# Altium PCB SM3320-BATT-EV.PcbDoc (part 1 of 2)
Units mm, origin at the board's own origin, x right, y up, seen from the top; angles counter-clockwise.
Board outline 119 x 66.5 mm, 2 copper layers (Top Layer, Bottom Layer), stack 1.662 mm thick; 115 components, 48 nets, 280 pads, 270 vias.
Unrouted connection lines stored in the file: 11.
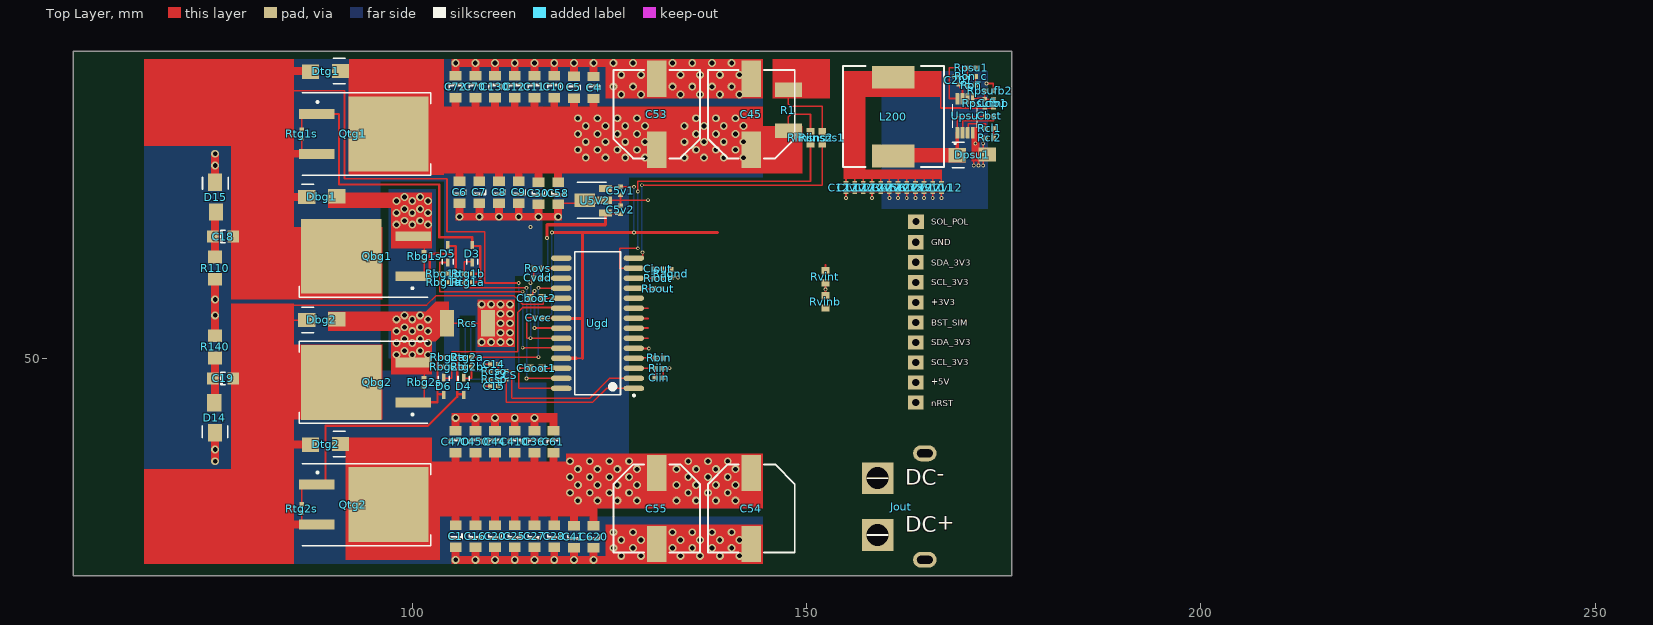
[diagram p0: Top Layer view]
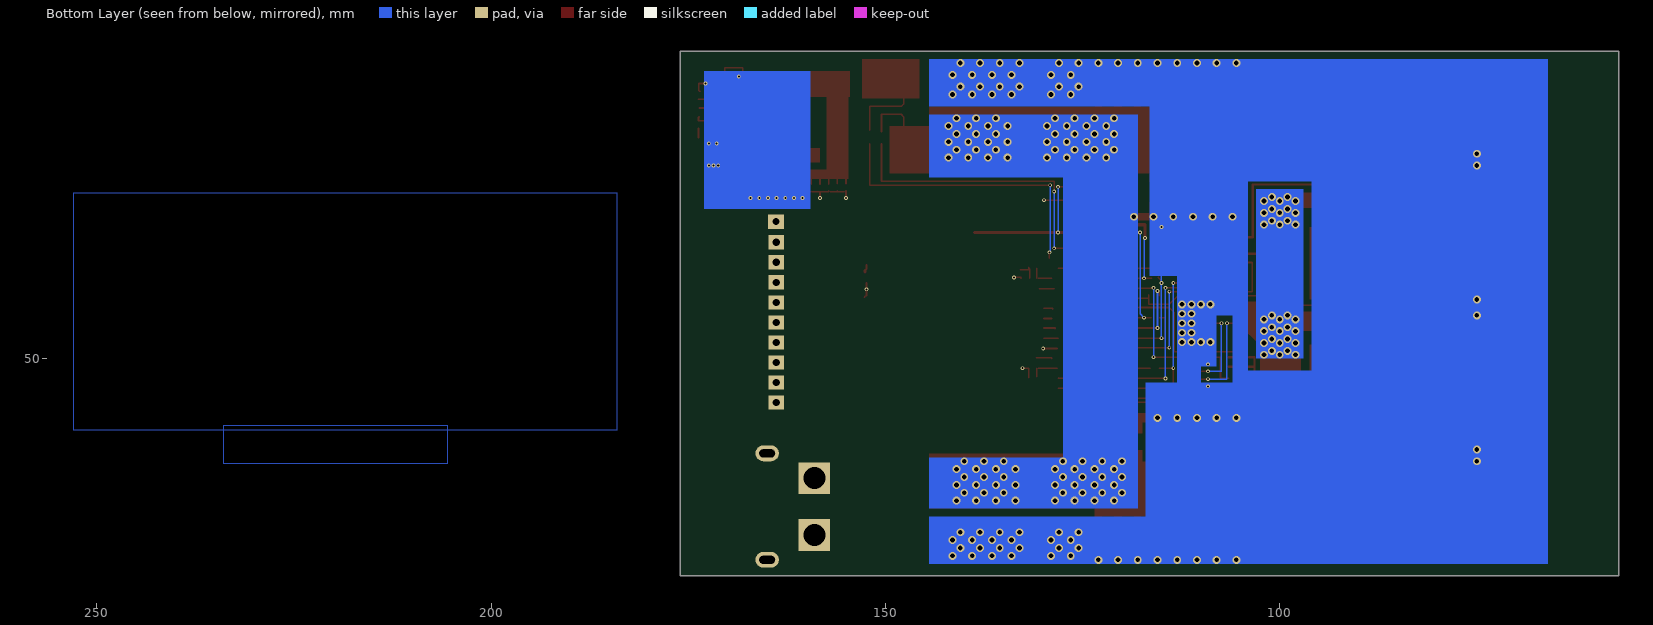
[diagram p1: Bottom Layer view, seen from below]
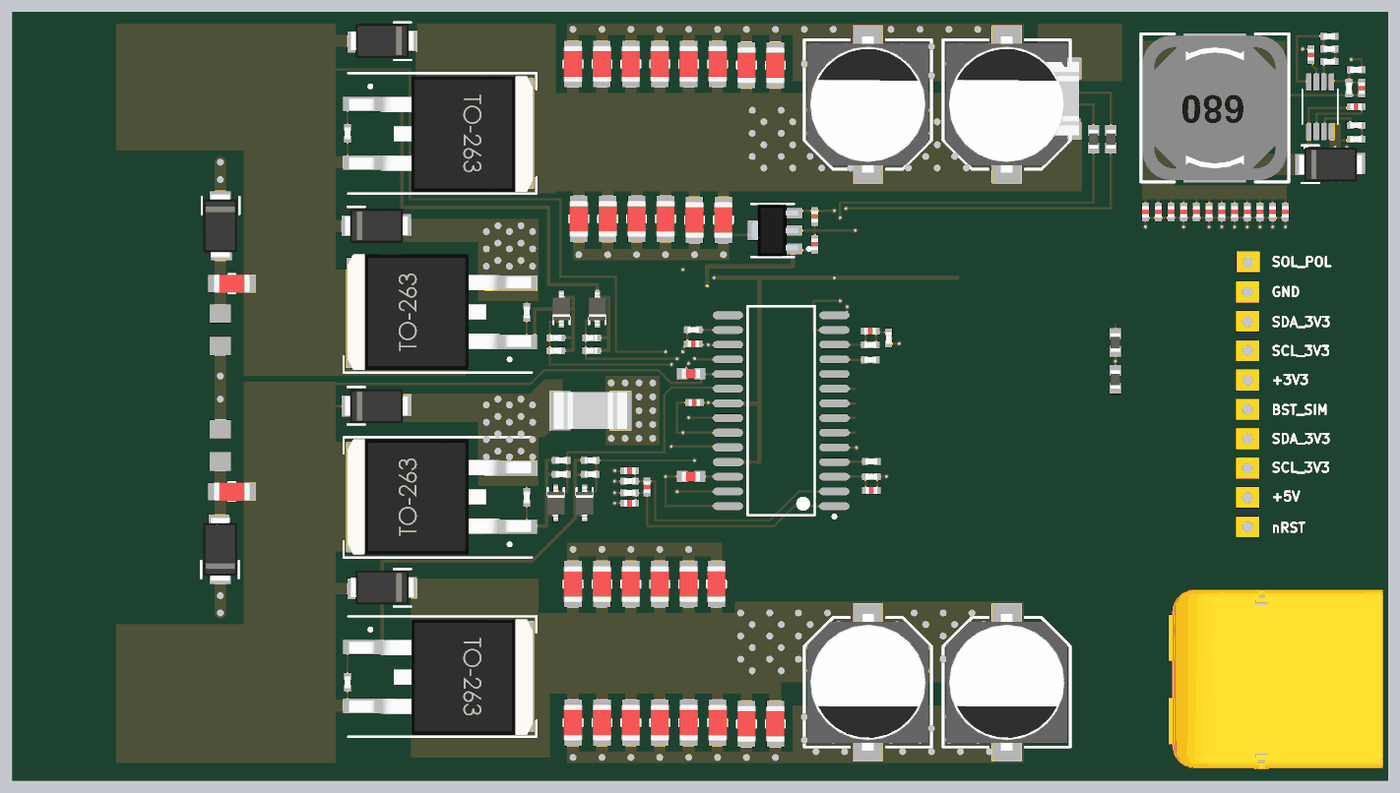
[diagram p3: 3D render of the assembled board from above, using the file's embedded part models]

## Layer stack, top to bottom
Top Solder: solder mask 0.0102, Solder Resist, Dk 3.5
Top Layer: signal copper 0.0711
Dielectric1: core 1.52, FR-4, Dk 4.8
Bottom Layer: signal copper 0.0711
Bottom Solder: solder mask 0.0102, Solder Resist, Dk 3.5

## Board outline
57,22.5 57,89 176,89 176,22.5

## Design rules (kind name [scope] priority, off if disabled: settings)
Clearance Clearance_12 [(IsRegion AND InNet('VIN_D') AND OnLayer('MidLayer4'))] p1: gap=0.61 ignorepadtopadclearanceinfootprint=FALSE except(0: Arc-Hole Track-Hole SMDPad-Hole THPad-Hole Via-Hole Fill-Hole Poly-Hole Region-Hole Text-Hole)
Clearance Clearance_11 [(IsRegion AND InNet('GND') AND OnLayer('MidLayer3'))] p2 off: gap=0.61 ignorepadtopadclearanceinfootprint=FALSE except(0: Arc-Hole Track-Hole SMDPad-Hole THPad-Hole Via-Hole Fill-Hole Poly-Hole Region-Hole Text-Hole)
Clearance Clearance_10 [InNamedPolygon('Top Layer-No Net 15')] p3: gap=0.635 ignorepadtopadclearanceinfootprint=FALSE except(0: Arc-Hole Track-Hole SMDPad-Hole THPad-Hole Via-Hole Fill-Hole Poly-Hole Region-Hole Text-Hole)
Clearance Clearance_8 [InNamedPolygon('Bottom Layer-No Net 5')] p4: gap=0.635 ignorepadtopadclearanceinfootprint=FALSE except(0: Arc-Hole Track-Hole SMDPad-Hole THPad-Hole Via-Hole Fill-Hole Poly-Hole Region-Hole Text-Hole)
Clearance Clearance_6 [InNamedPolygon('MidLayer1-No Net 5')] p5: gap=0.406 ignorepadtopadclearanceinfootprint=FALSE except(0: Arc-Hole Track-Hole SMDPad-Hole THPad-Hole Via-Hole Fill-Hole Poly-Hole Region-Hole Text-Hole)
Clearance Clearance_13 [InNamedPolygon('MidLayer3-No Net 5')] p6: gap=0.406 ignorepadtopadclearanceinfootprint=FALSE except(0: Arc-Hole Track-Hole SMDPad-Hole THPad-Hole Via-Hole Fill-Hole Poly-Hole Region-Hole Text-Hole)
Clearance Clearance_5 [InNamedPolygon('Top Layer-No Net 16')] p7: gap=0.635 ignorepadtopadclearanceinfootprint=FALSE except(0: Arc-Hole Track-Hole SMDPad-Hole THPad-Hole Via-Hole Fill-Hole Poly-Hole Region-Hole Text-Hole)
Clearance Clearance_3 [InNamedPolygon('Top Layer-No Net 17')] p8: gap=0.635 ignorepadtopadclearanceinfootprint=FALSE except(0: Arc-Hole Track-Hole SMDPad-Hole THPad-Hole Via-Hole Fill-Hole Poly-Hole Region-Hole Text-Hole)
Clearance Clearance_1 [InNamedPolygon('Bottom Layer-No Net 5')] p9: gap=0.635 ignorepadtopadclearanceinfootprint=FALSE except(0: Arc-Hole Track-Hole SMDPad-Hole THPad-Hole Via-Hole Fill-Hole Poly-Hole Region-Hole Text-Hole)
Clearance [All] p10: gap=0.15 ignorepadtopadclearanceinfootprint=FALSE
Clearance HV_NETS [InNetClass('HV_NETS')] p11: gap=0.61 ignorepadtopadclearanceinfootprint=FALSE except(0: Arc-Hole Track-Hole SMDPad-Hole THPad-Hole Via-Hole Fill-Hole Poly-Hole Region-Hole Text-Hole)
Clearance Clearance_2 [All] p12: gap=0.254 ignorepadtopadclearanceinfootprint=FALSE except(0: Arc-Hole Track-Hole SMDPad-Hole THPad-Hole Via-Hole Fill-Hole Poly-Hole Region-Hole Text-Hole)
Clearance Clearance_9 [(InComponent('P1')) vs (OnLayer('Keep-Out Layer'))] p13: gap=0 ignorepadtopadclearanceinfootprint=FALSE
Clearance Clearance_7 [InNamedPolygon('Top Layer-No Net 4')] p14: gap=0.241 ignorepadtopadclearanceinfootprint=FALSE except(0: Arc-Hole Track-Hole SMDPad-Hole THPad-Hole Via-Hole Fill-Hole Poly-Hole Region-Hole Text-Hole)
Clearance Clearance_4 [InNamedPolygon('MidLayer1-No Net')] p15: gap=0.241 ignorepadtopadclearanceinfootprint=FALSE except(0: Arc-Hole Track-Hole SMDPad-Hole THPad-Hole Via-Hole Fill-Hole Poly-Hole Region-Hole Text-Hole)
ComponentClearance [All] p1: gap=0.635 collisioncheckmode=3 verticalgap=0.254 showdistances=FALSE
ComponentClearance ComponentClearance_1 [All] p2: gap=0.254 collisioncheckmode=3 verticalgap=0.254 showdistances=FALSE
DiffPairsRouting DiffPairsRouting_1 [All] p2: maxlimit=0.254 minlimit=0.254 mostfreqgap=0.254 toplayer_minwidth=0.381 toplayer_maxwidth=0.381 toplayer_prefwidth=0.381 bottomlayer_minwidth=0.381 bottomlayer_maxwidth=0.381 bottomlayer_prefwidth=0.381 maxuncoupledlength=12.7
FabricationTestPointUsage TestPointUsage [All] p1: valid=0 allowmultiple=FALSE
FabricationTestPointUsage TestPointUsage_1 [All] p2: valid=0 allowmultiple=FALSE
FabricationTestpoint Testpoint [All] p1: side=3 testpointundercomponent=TRUE minsize=1.016 maxsize=2.54 preferedsize=1.524 minholesize=0 maxholesize=1.016 preferedholesize=0.813 testpointgrid=0.025 allowsidetop=TRUE allowsidebottom=TRUE usegrid=TRUE gridtolerance=0
FabricationTestpoint Testpoint_1 [All] p2: side=3 testpointundercomponent=TRUE minsize=1.016 maxsize=2.54 preferedsize=1.524 minholesize=0 maxholesize=1.016 preferedholesize=0.813 testpointgrid=0.025 allowsidetop=TRUE allowsidebottom=TRUE usegrid=TRUE gridtolerance=0
FanoutControl Fanout_LCC [IsLCC] p1: bgadir=Out bgaviamode=Centered fanoutstyle=Auto fanoutdirection=Alternating viagrid=0.025 // Fanout_LCC (Default Rule)
FanoutControl Fanout_BGA [IsBGA] p2: bgadir=Out bgaviamode=Centered fanoutstyle=Auto fanoutdirection=Alternating viagrid=0.025 // Fanout_BGA (Default Rule)
FanoutControl Fanout_Default [All] p4: bgadir=Out bgaviamode=Centered fanoutstyle=Auto fanoutdirection=Alternating viagrid=0.025 // Fanout_Default (Default Rule)
FanoutControl Fanout_Small [(CompPinCount < 5)] p5: bgadir=Out bgaviamode=Centered fanoutstyle=Auto fanoutdirection=OutThenIn viagrid=0.025 // Fanout_Small (Default Rule)
FanoutControl Fanout_BGA_1 [IsBGA] p6: bgadir=Out bgaviamode=Centered fanoutstyle=Auto fanoutdirection=Alternating viagrid=0.025 // Fanout_BGA (Default Rule)
FanoutControl Fanout_LCC_1 [IsLCC] p7: bgadir=Out bgaviamode=Centered fanoutstyle=Auto fanoutdirection=Alternating viagrid=0.025 // Fanout_LCC (Default Rule)
FanoutControl Fanout_SOIC_1 [IsSOIC] p8: bgadir=Out bgaviamode=Centered fanoutstyle=Auto fanoutdirection=Alternating viagrid=0.025 // Fanout_SOIC (Default Rule)
FanoutControl Fanout_Small_1 [(CompPinCount < 5)] p9: bgadir=Out bgaviamode=Centered fanoutstyle=Auto fanoutdirection=OutThenIn viagrid=0.025 // Fanout_Small (Default Rule)
FanoutControl Fanout_Default_1 [All] p10: bgadir=Out bgaviamode=Centered fanoutstyle=Auto fanoutdirection=Alternating viagrid=0.025 // Fanout_Default (Default Rule)
Height Height_1 [All] p2: minheight=0 maxheight=25.4 prefheight=12.7
HoleSize [All] p1: absolutevalues=TRUE maxlimit=6.375 minlimit=0.198 maxpercent=80.000 minpercent=20.000
HoleSize HoleSize_1 [All] p2: absolutevalues=TRUE maxlimit=2.54 minlimit=0.025 maxpercent=80.000 minpercent=20.000
LayerPairs LayerPairs_1 [All] p2: enforce=TRUE
MinimumAnnularRing [All] p1: minimumring=0.203
PasteMaskExpansion PasteMaskExpansion_1 [All] p2: expansion=0
PlaneClearance PlaneClearance_1 [All] p2: clearance=0.508
PlaneConnect [All] p1: planeconnectstyle=Relief reliefexpansion=0.254 reliefentries=4 reliefconductorwidth=0.203 reliefairgap=0.254
PolygonConnect PolygonConnect_12 [All vs IsNamedPolygon('Top Layer-No Net 4') Or  IsNamedPolygon('Top Layer-GND') Or  IsNamedPolygon('Vout') Or  IsNamedPolygon('Top Layer-No Net 4') Or  IsNamedPolygon('Top Layer-No Net 4') Or  IsNamedPolygon('Top Layer-No Net 4') Or  IsNamedPolygon('Top Layer-No Net 4') Or  IsNamedPolygon('Top Layer-No Net 4') Or  IsNamedPolygon('Top Layer-No Net 4') Or  IsNamedPolygon('Top Layer-No Net 4') Or  IsNamedPolygon('Top Layer-No Net 4') Or  IsNamedPolygon('Top Layer-No Net 4') Or  IsNamedPolygon('Top Layer-No Net 4') Or  IsNamedPolygon('Top Layer-No Net 4') Or  IsNamedPolygon('MidLayer1-No Net') Or  IsNamedPolygon('Top Layer-No Net 4') Or  IsNamedPolygon('Top Layer-No Net 4') Or  IsNamedPolygon('Top Layer-No Net 4') Or  IsNamedPolygon('Top Layer-No Net 4') Or  IsNamedPolygon('Top Layer-No Net 4') Or  IsNamedPolygon('Top Layer-No Net 3') Or  IsNamedPolygon('Top Layer-No Net 4') Or  IsNamedPolygon('Top Layer-No Net 4') Or  IsNamedPolygon('Top Layer-No Net 4') Or  IsNamedPolygon('Top Layer-No Net 4') Or  IsNamedPolygon('Top Layer-No Net 3') Or  IsNamedPolygon('Top Layer-No Net 4') Or  IsNamedPolygon('Top Layer-No Net 4') Or  IsNamedPolygon('Top Layer-No Net 1') Or  IsNamedPolygon('Top Layer-No Net 4') Or  IsNamedPolygon('Top Layer-No Net 4') Or  IsNamedPolygon('Top Layer-No Net 4') Or  IsNamedPolygon('Top Layer-No Net 2') Or  IsNamedPolygon('Top Layer-No Net 4') Or  IsNamedPolygon('Top Layer-No Net 4') Or  IsNamedPolygon('Top Layer-No Net 4') Or  IsNamedPolygon('Top Layer-No Net 4') Or  IsNamedPolygon('Top Layer-No Net') Or  IsNamedPolygon('Top Layer-No Net 4')] p1: connectstyle=Direct reliefconductorwidth=0.254 reliefentries=4 polygonreliefangle="90 Angle" airgapwidth=0.254
PolygonConnect PolygonConnect_11 [All vs IsNamedPolygon('Vout') Or  IsNamedPolygon('MidLayer1-No Net')] p2: connectstyle=Direct reliefconductorwidth=0.254 reliefentries=4 polygonreliefangle="90 Angle" airgapwidth=0.254
PolygonConnect PolygonConnect_10 [All vs IsNamedPolygon('Top Layer-No Net 4')] p3: connectstyle=Direct reliefconductorwidth=0.254 reliefentries=4 polygonreliefangle="90 Angle" airgapwidth=0.254
PolygonConnect PolygonConnect_9 [All vs IsNamedPolygon('Top Layer-No Net 4')] p4: connectstyle=Direct reliefconductorwidth=0.254 reliefentries=4 polygonreliefangle="90 Angle" airgapwidth=0.254
PolygonConnect PolygonConnect_8 [All vs IsNamedPolygon('Top Layer-No Net') Or  IsNamedPolygon('MidLayer1-No Net') Or  IsNamedPolygon('Top Layer-No Net 4')] p5: connectstyle=Direct reliefconductorwidth=0.254 reliefentries=4 polygonreliefangle="90 Angle" airgapwidth=0.254
PolygonConnect PolygonConnect_7 [All vs IsNamedPolygon('Top Layer-No Net') Or  IsNamedPolygon('Top Layer-No Net 3') Or  IsNamedPolygon('MidLayer1-No Net')] p6: connectstyle=Direct reliefconductorwidth=0.254 reliefentries=4 polygonreliefangle="90 Angle" airgapwidth=0.254
PolygonConnect PolygonConnect_6 [All vs IsNamedPolygon('Top Layer-No Net 2') Or  IsNamedPolygon('MidLayer1-No Net') Or  IsNamedPolygon('Top Layer-No Net')] p7: connectstyle=Direct reliefconductorwidth=0.254 reliefentries=4 polygonreliefangle="90 Angle" airgapwidth=0.254
PolygonConnect PolygonConnect_5 [All vs IsNamedPolygon('Top Layer-No Net') Or  IsNamedPolygon('Top Layer-No Net 1') Or  IsNamedPolygon('MidLayer1-No Net')] p8: connectstyle=Direct reliefconductorwidth=0.254 reliefentries=4 polygonreliefangle="90 Angle" airgapwidth=0.254
PolygonConnect PolygonConnect_4 [All vs IsNamedPolygon('MidLayer1-No Net') Or  IsNamedPolygon('Top Layer-No Net')] p9: connectstyle=Direct reliefconductorwidth=0.254 reliefentries=4 polygonreliefangle="90 Angle" airgapwidth=0.254
PolygonConnect PolygonConnect_3 [All vs IsNamedPolygon('Top Layer-No Net') Or  IsNamedPolygon('Top Layer-GND')] p10: connectstyle=Direct reliefconductorwidth=0.254 reliefentries=4 polygonreliefangle="90 Angle" airgapwidth=0.254
PolygonConnect PolygonConnect_2 [All vs IsNamedPolygon('Top Layer-No Net')] p11: connectstyle=Direct reliefconductorwidth=0.254 reliefentries=4 polygonreliefangle="90 Angle" airgapwidth=0.254
PolygonConnect [All] p12: connectstyle=Direct reliefconductorwidth=0.203 reliefentries=4 polygonreliefangle="90 Angle" airgapwidth=0.254
PolygonConnect PolygonConnect_1 [All] p13: connectstyle=Direct reliefconductorwidth=0.254 reliefentries=4 polygonreliefangle="90 Angle" airgapwidth=0.254
RoutingPriority RoutingPriority_1 [All] p2: routingpriority=0
RoutingTopology RoutingTopology_1 [All] p2: topology=Shortest
RoutingVias [All] p1: holewidth=0.406 width=0.813 viastyle="Through Hole" minholewidth=0.254 minwidth=0.635 maxholewidth=0.508 maxwidth=1.016
ShortCircuit ShortCircuit_1 [All] p2: allowed=FALSE
SilkToSolderMaskClearance SilkscreenOverComponentPads [IsPad] p1: minsilkscreentomaskgap=0.127 clearancetoexposedcopper=TRUE
SolderMaskExpansion SolderMaskExpansion_2 [(IsVia And (HoleDiameter  < 15))] p1: expansion=-0.356
SolderMaskExpansion [All] p2: expansion=0.051
SolderMaskExpansion SolderMaskExpansion_1 [All] p3: expansion=0.051
UnRoutedNet UnRoutedNet_1 [All] p2:
Width [All] p1: maxlimit=2.54 minlimit=0.152 preferedwidth=0.254
20 further rules are at their usual default settings.

## Components (designator, comment, footprint, x,y, rotation, side; value= is the part's Value field where it differs from the comment)
C1 "1206B105K101NT" C_1206#1 105.503,27.505 r90 top value=1uF
C4 "1206B105K101NT" C_1206#1 122.997,84.395 r270 top value=1uF
C5 "1206B105K101NT" C_1206#1 120.5,84.4 r270 top value=1uF
C5v1 "CL05A105KA5NQNC" C_0402 126.4,71.3 r90 top value=1uF
C5v2 "CL05A106MQ5NUNC" C_0402 126.4,68.9 r270 top value=10uF
C6 "1206B105K101NT" C_1206#1 106,71.1 r90 top value=1uF
C7 "1206B105K101NT" C_1206#1 108.5,71.1 r90 top value=1uF
C8 "1206B105K101NT" C_1206#1 111,71.1 r90 top value=1uF
C9 "1206B105K101NT" C_1206#1 113.5,71.1 r90 top value=1uF
C10 "1206B105K101NT" C_1206#1 118,84.5 r270 top value=1uF
C11 "1206B105K101NT" C_1206#1 115.5,84.5 r270 top value=1uF
C12 "1206B105K101NT" C_1206#1 113,84.5 r270 top value=1uF
C12v1 "CL05A105KA5NQNC" C_0402 155,71.7 r270 top value=1uF
C12v2 "CL05A105KA5NQNC" C_0402 156.1,71.7 r270 top value=1uF
C12v3 "CL05A105KA5NQNC" C_0402 157.2,71.7 r270 top value=1uF
C12v4 "CL05A105KA5NQNC" C_0402 158.3,71.7 r270 top value=1uF
C12v5 "CL05A105KA5NQNC" C_0402 159.4,71.7 r270 top value=1uF
C12v6 "CL05A105KA5NQNC" C_0402 160.5,71.708 r270 top value=1uF
C12v7 "CL05A105KA5NQNC" C_0402 161.6,71.7 r270 top value=1uF
C12v8 "CL05A105KA5NQNC" C_0402 162.7,71.7 r270 top value=1uF
C12v9 "CL05A105KA5NQNC" C_0402 163.8,71.7 r270 top value=1uF
C12v10 "CL05A105KA5NQNC" C_0402 164.9,71.7 r270 top value=1uF
C12v11 "CL05A105KA5NQNC" C_0402 166,71.7 r270 top value=1uF
C12v12 "CL05A105KA5NQNC" C_0402 167.1,71.7 r270 top value=1uF
C14 "0402CG6R8C500NT" C_0402 110.4,49.3 r180 top value=6.8pF
C15 "0402CG6R8C500NT" C_0402 110.4,46.5 r180 top value=6.8pF
C16 "1206B105K101NT" C_1206#1 108.003,27.505 r90 top value=1uF
C18 "1206B102K202NT" C_1206#2 76,65.5 r0 top value=1nF
C19 "1206B102K202NT" C_1206#2 76,47.5 r0 top value=1nF
C20 "1206B105K101NT" C_1206#1 110.503,27.505 r90 top value=1uF
C25 "1206B105K101NT" C_1206#1 113.003,27.505 r90 top value=1uF
C27 "1206B105K101NT" C_1206#1 115.503,27.505 r90 top value=1uF
C28 "1206B105K101NT" C_1206#1 118,27.5 r90 top value=1uF
C30 "1206B105K101NT" C_1206#1 116,71 r90 top value=1uF
C36 "1206B105K101NT" C_1206#1 115.497,39.495 r270 top value=1uF
C41 "1206B105K101NT" C_1206#1 120.5,27.4 r90 top value=1uF
C44 "1206B105K101NT" C_1206#1 110.497,39.495 r270 top value=1uF
C45 "VZH470M2ATR-1010" C_CAN_1010 143,81 r270 top value=47uF
C53 "VZH470M2ATR-1010" C_CAN_1010 131,81 r270 top value=47uF
C54 "VZH470M2ATR-1010" C_CAN_1010 143,31 r90 top value=47uF
C55 "VZH470M2ATR-1010" C_CAN_1010 131,31 r90 top value=47uF
C58 "1206B105K101NT" C_1206#1 118.5,71 r90 top value=1uF
C61 "1206B105K101NT" C_1206#1 117.9,39.5 r270 top value=1uF
C70 "1206B105K101NT" C_1206#1 108,84.5 r270 top value=1uF
C72 "1206B105K101NT" C_1206#1 105.5,84.5 r270 top value=1uF
C130 "1206B105K101NT" C_1206#1 110.5,84.5 r270 top value=1uF
C201 "CL05A105KA5NQNC" C_0402 169.3,85.3 r90 top value=1uF
C410 "1206B105K101NT" C_1206#1 112.997,39.495 r270 top value=1uF
C450 "1206B105K101NT" C_1206#1 107.997,39.495 r270 top value=1uF
C470 "1206B105K101NT" C_1206#1 105.497,39.495 r270 top value=1uF
C620 "1206B105K101NT" C_1206#1 123,27.4 r90 top value=1uF
Cboot1 "CL10B474KA8NNNC" C_0603 115.7,48.8 r0 top value=47nF
Cboot2 "CL10B474KA8NNNC" C_0603 115.7,57.7 r180 top value=47nF
Cbst "CL05B103KB5NNNC" C_0402 173.2,80.8 r180 top value=10nF
Ccmp "CL05B332KB5NNNC" C_0402 173.7,82.4 r270 top value=3.3nF
CCS "0402CG560J500NT" C_0402 111.9,47.9 r270 top value=56pF
Ciin "0402B102K500NT" C_0402 131.3,47.6 r180 top value=1nF
Ciout "0402B102K500NT" C_0402 131.2,61.4 r180 top value=1nF
Cvcc "CL05A105KA5NQNC" C_0402 116,55.2 r0 top value=1uF
Cvdd "CL05B104KO5NNNC" C_0402 115.9,60.3 r0 top value=100nF
D3 "N4148WS" SOD-323 107.6,63.3 r90 top
D4 "N4148WS" SOD-323 106.5,46.5 r270 top
D5 "N4148WS" SOD-323 104.5,63.3 r90 top
D6 "N4148WS" SOD-323 104,46.5 r270 top
D14 "SS210" DO-214AC 75,42.5 r90 top
D15 "SS210" DO-214AC 75,70.5 r270 top
Dbg1 "SS210" DO-214AC 88.5,70.5 r0 top
Dbg2 "SS210" DO-214AC 88.5,54.9 r0 top
Dpsu1 "SS210" DO-214AC 171,75.8 r0 top
Dtg1 "SS210" DO-214AC 89,86.5 r180 top
Dtg2 "SS210" DO-214AC 89,39.2 r180 top
Jout "XT60PW_M" XT60PW_M 159,31.25 r270 top
L200 "SWRB1207S-221MT" SRR1260 161,80.7 r90 top value=220uH
Qbg1 "FDB33N25TM" TO-263-3 93.921,63 r180 top
Qbg2 "FDB33N25TM" TO-263-3 93.921,47 r180 top
Qtg1 "FDB33N25TM" TO-263-3 94.079,78.5 r0 top
Qtg2 "FDB33N25TM" TO-263-3 94.079,31.5 r0 top
R1 "1m" R_2512 147.7,81.5 r90 top
R110 "1206W4F100JT5E" R_1206 75,61.5 r90 top value=10R
R140 "1206W4F100JT5E" R_1206 75,51.5 r270 top value=10R
Ragnd "0402WGF0000TCE" R_0402 132.8,60.8 r90 top value=0R
Rbg1a "0402WGF100JTCE" R_0402 104,59.7 r0 top value=10R
Rbg1b "0402WGF100JTCE" R_0402 104,60.8 r0 top value=10R
Rbg1s "0402WGF1002TCE" R_0402 101.5,63 r270 top value=10k
Rbg2a "0402WGF100JTCE" R_0402 104.492,50.2 r0 top value=10R
Rbg2b "0402WGF100JTCE" R_0402 104.492,49 r0 top value=10R
Rbg2s "0402WGF1002TCE" R_0402 101.5,47 r90 top value=10k
Rbin "0402WGF100JTCE" R_0402 131.3,50.1 r180 top value=10R
Rbout "0402WGF100JTCE" R_0402 131.2,58.9 r180 top value=10R
Rcl1 "0402WGF3302TCE" R_0402 173.2,79.2 r180 top value=33k
Rcl2 "0402WGF1003TCE" R_0402 173.2,78 r0 top value=100k
Rcs "1m" R_2512 107,54.5 r0 top
Rcsg "0402WGF1000TCE" R_0402 110.4,48.4 r180 top value=100R
Rcsp "0402WGF1000TCE" R_0402 110.4,47.4 r180 top value=100R
Riin "0402WGF5602TCE" R_0402 131.3,48.8 r180 top value=56k
Riinsns1 "0603WAF6800T5E" R_0603 152,78 r90 top value=680R
Riinsns2 "0603WAF6800T5E" R_0603 150.5,78 r90 top value=680R
Riout "0402WGF5602TCE" R_0402 131.2,60.2 r180 top value=56k
Ron "0402WGF2003TCE" R_0402 170.9,84.7 r180 top value=200k
Ron_c "0402WGF4702TCE" R_0402 170.9,85.8 r0 top value=47k
Rovs "0402WGF1002TCE" R_0402 115.9,61.5 r180 top value=10k
Rpsu1 "0402WGF0000TCE" R_0402 170.9,86.9 r0 top value=0R
Rpsufb1 "0402WGF1002TCE" R_0402 172.6,82.4 r90 top value=10k
Rpsufb2 "0402WGF3301TCE" R_0402 173.2,84 r180 top value=3.3k
Rtg1a "0402WGF100JTCE" R_0402 107.1,59.7 r0 top value=10R
Rtg1b "0402WGF100JTCE" R_0402 107.1,60.8 r0 top value=10R
Rtg1s "0402WGF1002TCE" R_0402 86,78.5 r90 top value=10k
Rtg2a "0402WGF100JTCE" R_0402 107,50.2 r0 top value=10R
Rtg2b "0402WGF100JTCE" R_0402 107,49 r0 top value=10R
Rtg2s "0402WGF1002TCE" R_0402 86,31 r270 top value=10k
Rvinb "0603WAF1002T5E" R_0603 152.4,57.2 r90 top value=10k
Rvint "0603WAF100KT5E" R_0603 152.4,60.4 r90 top value=100k
U5V2 "78L05G-AB3-R" SOT-223-3 122.7,70.1 r180 top
Ugd "SM72295MAX" M28B_M 123.5,54.5 r180 top
Upsu "LM5008MMX/NOPB" SOP65P490X110-8N 170.1,80.8 r90 top

## Footprints (in the part's own frame and the unit in brackets; to place one, negate y for a bottom-side part, rotate by r counter-clockwise, add the part's x,y. Pads: shape width x height; smd on the part's side, far side on the other; paste and mask are expansions set on the pad)
C_0402 [mm] "Chip Capacitor; Body 1.0 x 0.5 mm (LxW typ)"
  rect 0.6x0.6 smd: 1(-0.508,0) 2(0.508,0)
  body extent -0.5,-0.3 0.5,0.3, height 0.2
C_0603 [mm] "Chip Capacitor; Body 1.6 x 0.8 mm (LxW typ)"
  rect 0.93x0.98 smd: 1(-0.77,0) 2(0.77,0)
  body extent -0.8,-0.4 0.8,0.4, height 0.3
C_1206#1 [mm] "Chip Capacitor; Body 3.2 x 1.6 mm (LxW typ)"
  rect 1.2x1.5 smd: 1(-1.395,0) 2(1.395,0)
  silkscreen extent -0.3,-0.8 0.3,0.8, body extent -1.6,-0.8 1.6,0.8, height 1
C_1206#2 [mm] "Chip Capacitor; Body 3.2 x 1.6 mm (LxW typ)"
  rect 1.5x1.5 smd: 1(-1.295,0) 2(1.295,0)
  silkscreen extent -0.3,-0.8 0.3,0.8, body extent -1.6,-0.8 1.6,0.8, height 1
C_CAN_1010 [mm] "SMD-ECAP-10x10"
  rect 4.6x2.5 smd: 1(-4.5,0) 2(4.5,0)
  silkscreen extent -5.6,-5.5 5.6,5.5, body extent -5.9,-5.25 5.9,5.25, height 10.3
DO-214AC [mm] "SMA Diode"
  rect 2.2x1.8 smd: 1(-1.9,0) 2(1.9,0.1)
  silkscreen extent -2.5,-1.6 -1,1.65, body extent -2.8,-1.48 2.8,1.47, height 2.9
M28B_M [mm] "SOIC, 28-Leads, Body 17.9x7.5mm, Pitch 1.27mm, IPC Low Density"
  oval 2.6x0.66 smd: 1(-4.6,8.255) 2(-4.6,6.985) 3(-4.6,5.715) 4(-4.6,4.445) 5(-4.6,3.175) 6(-4.6,1.905) 7(-4.6,0.635) 8(-4.6,-0.635) 9(-4.6,-1.905) 10(-4.6,-3.175) 11(-4.6,-4.445) 12(-4.6,-5.715) 13(-4.6,-6.985) 14(-4.6,-8.255) 16(4.6,-6.985) 17(4.6,-5.715) 18(4.6,-4.445) 19(4.6,-3.175) 20(4.6,-1.905) 26(4.6,5.715) 27(4.6,6.985) 28(4.6,8.255)
  oval 2.6x0.7 smd: 15(4.6,-8.255) 21(4.6,-0.635) 22(4.6,0.635) 23(4.6,1.905) 24(4.6,3.175) 25(4.6,4.445)
  silkscreen extent -4.72,-9.05 2.9,9.28, body extent -3.8,-9.06 3.8,9.06, height 2.64
R_0402 [mm] "Body 1.0 x 0.5 mm (LxW typ)"
  rect 0.6x0.6 smd: 1(-0.508,0) 2(0.508,0)
  body extent -0.5,-0.25 0.5,0.25, height 0.35
R_0603 [mm] "Body 1.6 x 0.8 mm (LxW typ)"
  rect 0.93x0.98 smd: 1(-0.77,0) 2(0.77,0)
  body extent -0.82,-0.41 0.83,0.41, height 0.46
R_1206 [mm] "Body 3.2 x 1.6 mm (LxW typ)"
  rect 1.6x1.8 smd: 1(-1.4,0) 2(1.4,0)
  body extent -1.91,-0.76 1.91,0.76, height 1
R_2512 [mm] "VISHAY SHUNT RESISTOR"
  rect 1.8x3.4 smd: 1(-2.6,0) 2(2.6,0)
  body extent -3.17,-1.57 3.17,1.6, height 1.22
SOD-323 [mm] "SOD-323/SC-76; 2 Leads; Body 1.7 x 1.3 mm, (LxW)"
  rect 1x0.45 smd: 1(-1.1,0) 2(1.1,0)
  silkscreen extent -1.3,-0.7 -0.7,0.7, body extent -1.43,-0.74 1.43,0.76, height 1.12
SOP65P490X110-8N [mm]
  rrect25% 1.47x0.48 smd: 1(-2.15,0.975) 2(-2.15,0.325) 3(-2.15,-0.325) 4(-2.15,-0.975) 5(2.15,-0.975) 6(2.15,-0.325) 7(2.15,0.325) 8(2.15,0.975)
  silkscreen extent -3.62,-1.54 1.5,1.54
SOT-223-3 [mm] "SOT223, 4-Leads, Body IPC High Density"
  rect 1.7x0.9 smd: 1(-1.8,1.6) 3(-1.8,-1.5)
  rect 2.5x0.9 smd: 2(-1.4,0)
  rect 2.6x1.7 smd: 2(0.8,0)
  silkscreen extent -3.33,-2.3 1.8,2.3, body extent -2.25,-2.25 1.75,2.25, height 1.5
SRR1260 [mm] "High Current Inductors"
  rect 2.9x5.4 smd: 1(-5,0) 2(5,0)
  silkscreen extent -6.4,-6.4 6.4,6.4, body extent -6.25,-6.25 6.25,6.25, height 6.29
TO-263-3 [mm] "D2PAK"
  rect 4.5x1.25 smd: 1(-6.223,2.54) 3(-6.223,-2.54)
  rect 10.16x9.5 smd: 2(2.921,0)
  silkscreen extent -8.02,3.81 8.25,5.21, body extent -7.94,-5.05 7.94,4.95, height 4.3
XT60PW_M [mm] "XT 60 Male Right Angle"
  oval 2x3 hole 1 slot 2 at 90 deg: M(-6.75,6) M(6.75,6)
  rect 4x4 hole 2.8: MINUS(-3.6,0) PLUS(3.6,0)
  silkscreen extent -3.6,-1.3 3.6,1.3, body extent -7.8,-1.7 7.7,16.5, height 8.4

## Part data
C1 C4 C5 C6 C7 C8 C9 C10 C11 C12 C16 C20 C25 C27 C28 C30 C36 C41 C44 C58 C61 C70 C72 C130 C410 C450 C470 C620: "C - CAPACITOR - MLCC - 1uF - 100V - 1206 - X7R", JLC Availability=Extended, LCSC Part #=C91151, WVDC=100
C5v1 C12v1 C12v2 C12v3 C12v4 C12v5 C12v6 C12v7 C12v8 C12v9 C12v10 C12v11 C12v12 C201 Cvcc: "C - CAPACITOR - MLCC - 1uF - 25V - 0402", JLC Availability=Basic, LCSC Part #=C52923, WVDC=16
C5v2: "C - CAPACITOR - MLCC - 10uF - 6.3V - 0402", JLC Availability=Basic, LCSC Part #=C15525, WVDC=6.3
C14 C15: "C - CAPACITOR - MLCC - 6.8pF - 50V - 0402", JLC Availability=Basic, LCSC Part #=C1576, WVDC=50
C18 C19: "C - CAPACITOR - MLCC - 1nF - 2000V - 1206 - X7R", JLC Availability=Basic, LCSC Part #=C9196, WVDC=2000
C45 C53 C54 C55: "C - CAPACITOR - ELECTROLYTIC - 47uF - 100V", JLC Availability=Extended, LCSC Part #=C164068, ESR=40mOhm, WVDC=100
Cboot1 Cboot2: "C - CAPACITOR - MLCC - 470nF - 25V - 0603", JLC Availability=Basic, LCSC Part #=C1623, WVDC=25
Cbst: "C - CAPACITOR - MLCC - 10nF - 50V - 0402", JLC Availability=Basic, LCSC Part #=C15195, WVDC=50
Ccmp: "C - CAPACITOR - MLCC - 3.3nF - 50V - 0402", JLC Availability=Basic, LCSC Part #=C26404, WVDC=50
CCS: "C - CAPACITOR - MLCC - 56pF - 50V -  0402", JLC Availability=Basic, LCSC Part #=C1572, WVDC=50
Ciin Ciout: "C - CAPACITOR - MLCC - 1nF - 50V - 0402", JLC Availability=Basic, LCSC Part #=C1523, WVDC=50
Cvdd: "C - CAPACITOR - MLCC - 100nF - 16V - 0402", JLC Availability=Basic, LCSC Part #=C1525, WVDC=16
D3 D4 D5 D6: "D - DIODE - FAST TRR - 100V - 150mA - 4ns", JLC Availability=Basic, LCSC Part #=C2128, If=150mA, PIV=100V, Trr=4ns
D14 D15 Dbg1 Dbg2 Dpsu1 Dtg1 Dtg2: "D - DIODE - SCHOTTKY - 100V - 2A", JLC Availability=Extended, LCSC Part #=C14996, If=2A, Vrrm=100
Jout: "J - JACK - POWER - XT60 - RIGHT - MALE", JLC Availability=None, LCSC Part #=X
L200: "L - INDUCTOR - 220uH - 1.6A - 12.5mm", JLC Availability=Extended, LCSC Part #=C169380, Isat=1.6A
Qbg1 Qbg2 Qtg1 Qtg2: "Q - TRANSISTOR - MOSFET (N) - 250V - 33A - 0.094R", JLC Availability=Extended, LCSC Part #=C241752, WVDC=250
R1 Rcs: library part FMF25FPJR005-LH, "R - RESISTOR - SMD - 0.005R - 1% - 2512 - 2W", JLC Availability=Extended, LCSC Part #=C371096, Power=2W, ComponentLink1Description=http://riedon.com/media/pdf/CSR.pdf, ComponentLink1URL=http://riedon.com/media/pdf/CSR.pdf
R110 R140: "R - RESISTOR - SMD - 10R - 1% - 1206", JLC Availability=Basic, LCSC Part #=C17903
Ragnd Rpsu1: "R - RESISTOR - SMD - 0R - 1% - 0402", JLC Availability=Basic, LCSC Part #=C17168
Rbg1a Rbg1b Rbg2a Rbg2b Rbin Rbout Rtg1a Rtg1b Rtg2a Rtg2b: "R - RESISTOR - SMD - 10R - 1% - 0402", JLC Availability=Basic, LCSC Part #=C25077
Rbg1s Rbg2s Rovs Rpsufb1 Rtg1s Rtg2s: "R - RESISTOR - SMD - 10k - 1% - 0402", JLC Availability=Basic, LCSC Part #=C25744
Rcl1: "R - RESISTOR - SMD - 33k - 1% - 0402", JLC Availability=Basic, LCSC Part #=C25779
Rcl2: "R - RESISTOR - SMD - 100k - 1% -  0402", JLC Availability=Basic, LCSC Part #=C25741
Rcsg Rcsp: "R - RESISTOR - SMD - 100R - 1% - 0402", JLC Availability=Basic, LCSC Part #=C25076
Riin Riout: "R - RESISTOR - SMD - 56k - 1% - 0402", JLC Availability=Basic, LCSC Part #=C25796
Riinsns1 Riinsns2: "R - RESISTOR - SMD - 680R - 1% - 0603", JLC Availability=Basic, LCSC Part #=C23228
Ron: "R - RESISTOR - SMD - 200k - 1% - 0402", JLC Availability=Basic, LCSC Part #=C25764
Ron_c: "R - RESISTOR - SMD - 47k - 1% - 0402", JLC Availability=Basic, LCSC Part #=C25792
Rpsufb2: "R - RESISTOR - SMD - 3.3k - 1% - 0402", JLC Availability=Basic, LCSC Part #=C25890
Rvinb: "R - RESISTOR - SMD - 10k - 1% - 0603", JLC Availability=Basic, LCSC Part #=C25804
Rvint: "R - RESISTOR - SMD - 100k - 1% -  0603", JLC Availability=Basic, LCSC Part #=C22936
U5V2: "U - IC - 5V Power Regulator", JLC Availability=Basic, LCSC Part #=C71136, VOut=5.0
Ugd: library part SM72295, "Photovoltaic Full Bridge Driver", Manufacturer="National Semiconductor", PackageTopMarking=S13051, ComponentLink1Description="Solar Magic Website", ComponentLink1URL=http://www.solarmagic.com, CompType=Driver, PackageDescription=SOIC-28, PackageReference=M28B_N, PartNumber=SM72295, PinCount=28, RoHS=Y
Upsu: "U - IC - BUCK CONVERTER, ADJUSTABLE, 95V, 350mA", Package=None, Availability=Unavailable, MP=LM5008MMX/NOPB, Price=None

## Free pads (board coordinates)
  rect 2x1.8 hole 0.9: 2(163.84,49.53) 2(163.84,52.07) 2(163.84,54.61) 2(163.84,57.15) 2(163.84,59.69) 2(163.84,62.23) 2(163.84,64.77) 2(163.88,67.38) ""(163.84,44.45) ""(163.84,46.99)

## Via types
v1: diameter 1, hole 0.6, Top Layer to Bottom Layer, tented both sides, 220 vias
v2: diameter 0.48, hole 0.254, Top Layer to Bottom Layer, tented both sides, 50 vias

## Nets (pads, with @x,y where several pads share a name; then routed paths per layer and width w, separated by ;. In a path a pad name is that pad's centre, name@x,y a point inside that pad or via, vN(x,y) a via of type N, cw(c..) or ccw(c..) an arc to the next point about the centre after c; other vN are vias at no path point)
+5V: C5v2.2 Cvdd.2 U5V2.1 Ugd.17 | length 19.3
  Top Layer w0.2: Cvdd.2@116.208,60.2 v2(117.2,60.2) Ugd.17@118,60.2 ; U5V2.1@125,68.3 125.092,68.392 C5v2.2@126.4,68.392
  Top Layer w0.4: v2(117.1,65.3) 117.1,67 124.5,67 U5V2.1@124.5,68.5 U5V2.1@124.2,68.5
  Bottom Layer w0.2: v2(117.1,65.3) 117.2,65.2 v2(117.2,60.2)
+10V: C5v1.2 C12v1.1 C12v2.1 C12v3.1 C12v4.1 C12v5.1 C12v6.1 C12v7.1 C12v8.1 C12v9.1 C12v10.1 C12v11.1 C12v12.1 Ccmp.2 Cvcc.2 L200.2 Rpsufb1.1 U5V2.3 Ugd.21 Ugd.25 | length 84.3
  Top Layer w0.2: Cvcc.2@116.308,55.2 Cvcc.2@116.508,55.2 v2(117.2,55.2) Ugd.21@118.6,55.2 ; Ugd.25@118.7,50.055 Ugd.25@118.9,50.055 ; 120.8,50.055 121.6,50.055 ; U5V2.3@124.8,71.8 124.8,71.808 C5v1.2@126.4,71.808 128.1,71.808 v2(128.1,71.8) ; C12v1.1@155,72.208 155,72.9 ; C12v2.1@156.1,72.208 156.1,72.9 ; C12v3.1@157.2,72.108 157.2,72.8 ; C12v4.1@158.3,72.108 158.3,72.8 ; C12v5.1@159.4,72.108 159.4,72.8 ; C12v6.1@160.5,72.108 160.5,72.8 ; C12v7.1@161.6,72.108 C12v7.1@161.6,72.208 ; C12v7.1@161.6,72.408 161.6,73 ; C12v8.1@162.7,72.108 162.7,72.8 ; L200.2@163.5,85 163.8,85.3 ; C12v9.1@163.8,72.208 163.8,72.9 ; C12v10.1@164.9,72.208 164.9,72.9 ; C12v11.1@166,72.208 166,72.9 ; 167,83.4 167,81.8 171.8,81.8 171.8,81.792 Rpsufb1.1@172.4,81.792 ; C12v12.1@167.1,72.208 167.1,72.9 ; Rpsufb1.1@172.6,81.792 Ccmp.2@173.6,81.792
  Top Layer w0.4: v2(117.7,66) 121.6,66 ; Ugd.25@118.9,50.055 120.8,50.055 ; Ugd.21@118.9,55.135 118.9,55.1 Ugd.21@119,55.1 ; 120.8,55.1 Ugd.21@119,55.1 ; 121.6,50.055 121.6,55.1 ; U5V2.3@124.2,71.7 U5V2.3@124.2,71.8 ; 138.7,66 v2(128.1,66) 121.6,66 ; 155.1,73.5 155.6,73 ; Ugd.21@119,55.1 121.6,55.1 ; 121.6,55.1 121.6,66
  Bottom Layer w0.2: v2(117.2,55.2) 117.7,55.7 v2(117.7,66) ; v2(128.1,66) v2(128.1,71.8)
AGND: Ciin.1 Ciout.1 Ragnd.2 Riin.1 Riout.1 Ugd.5 | length 6.3
  Top Layer w0.2: Ugd.5@128.2,51.325 128.2,51.3 v2@129.9,51.3 ; Ciout.1@131.7,61.308 Ragnd.2@132.9,61.308 ; Riout.1@131.708,60.2 Ciout.1@131.708,61.4 ; 131.8,48 131.808,48 ; Riin.1@131.8,48.808 Riin.1@131.808,48.8 ; Ciout.1@131.8,61.4 131.808,61.4 Ciout.1@131.808,61.6 ; Ciin.1@131.808,47.6 Riin.1@131.808,48.8 ; v2(132.6,48.8) Riin.1@131.808,48.8
  other v2: 130,51.3
BG1: D5.1 Rbg1a.1 Rbg1b.1 Ugd.24 | length 27.2
  Top Layer w0.2: D5.1@104.5,62.2 103.6,62.2 ; v2(114,51.4) 118.6,51.4 Ugd.24@118.7,51.3 ; v2(114,58.5) 103.5,58.5 103.5,62.1 ; 103.5,62.1 103.6,62.2 ; 103.5,62.1 103.5,62.2 103.6,62.2
  Bottom Layer w0.2: v2(114,51.4) v2(114,58.5)
BG2: D6.1 Rbg2a.2 Rbg2b.2 Ugd.20 | length 22.5
  Top Layer w0.2: D6.1@104,47.5 105,47.5 Rbg2b.2@105,49 Rbg2a.2@105,50.2 105,50.9 113.4,50.9 113.4,55.9 114,56.5 Ugd.20@117.9,56.5
BIN: Rbin.2 Ugd.4 | length 2.1
  Top Layer w0.2: Ugd.4@128.9,50 128.9,50.1 Rbin.2@130.892,50.1
BIN_R: Rbin.1
BOOST1: Cboot1.2 Ugd.26 | length 2.3
  Top Layer w0.2: Cboot1.2@116.4,48.8 118.7,48.8 Ugd.26@118.7,48.785
BOOST2: Cboot2.2 Ugd.22 | length 8.7
  Top Layer w0.2: Cboot2.2@115.292,58 115.292,58.392 v2(115.5,58.6) ; v2(115.5,53.9) 118.7,53.9 Ugd.22@118.7,53.865
  Bottom Layer w0.2: v2@115.4,58.6 v2(115.5,58.6) v2(115.5,53.9)
BOUT: Rbout.2 Ugd.11 | length 1.9
  Top Layer w0.2: Ugd.11@128.6,58.9 Rbout.2@130.5,58.9
BOUT_R: Rbout.1
FBIN: Rvinb.2 Rvint.1 | length 2.4
  Top Layer w0.2: Rvint.1@152.4,59.63 v2(152.4,58.8) Rvinb.2@152.4,58.1 ; Rvinb.2@152.7,57.8 152.6,57.8 Rvinb.2@152.6,57.9 ; Rvinb.2@152.4,58.1 Rvinb.2@152.6,57.9 ; Rvinb.2@152.4,58.1 Rvinb.2@152.4,57.97 Rvinb.2@152.6,57.9